# Altium PCB BOOSTXL-K350QVG-S1.PcbDoc (part 3 of 4)
Units mm, origin at the board's own origin, x right, y up, seen from the top; angles counter-clockwise.
Board outline 152.4 x 101.6 mm, 2 copper layers (Top Layer, Bottom Layer); 36 components, 58 nets, 6671 pads, 44 vias.
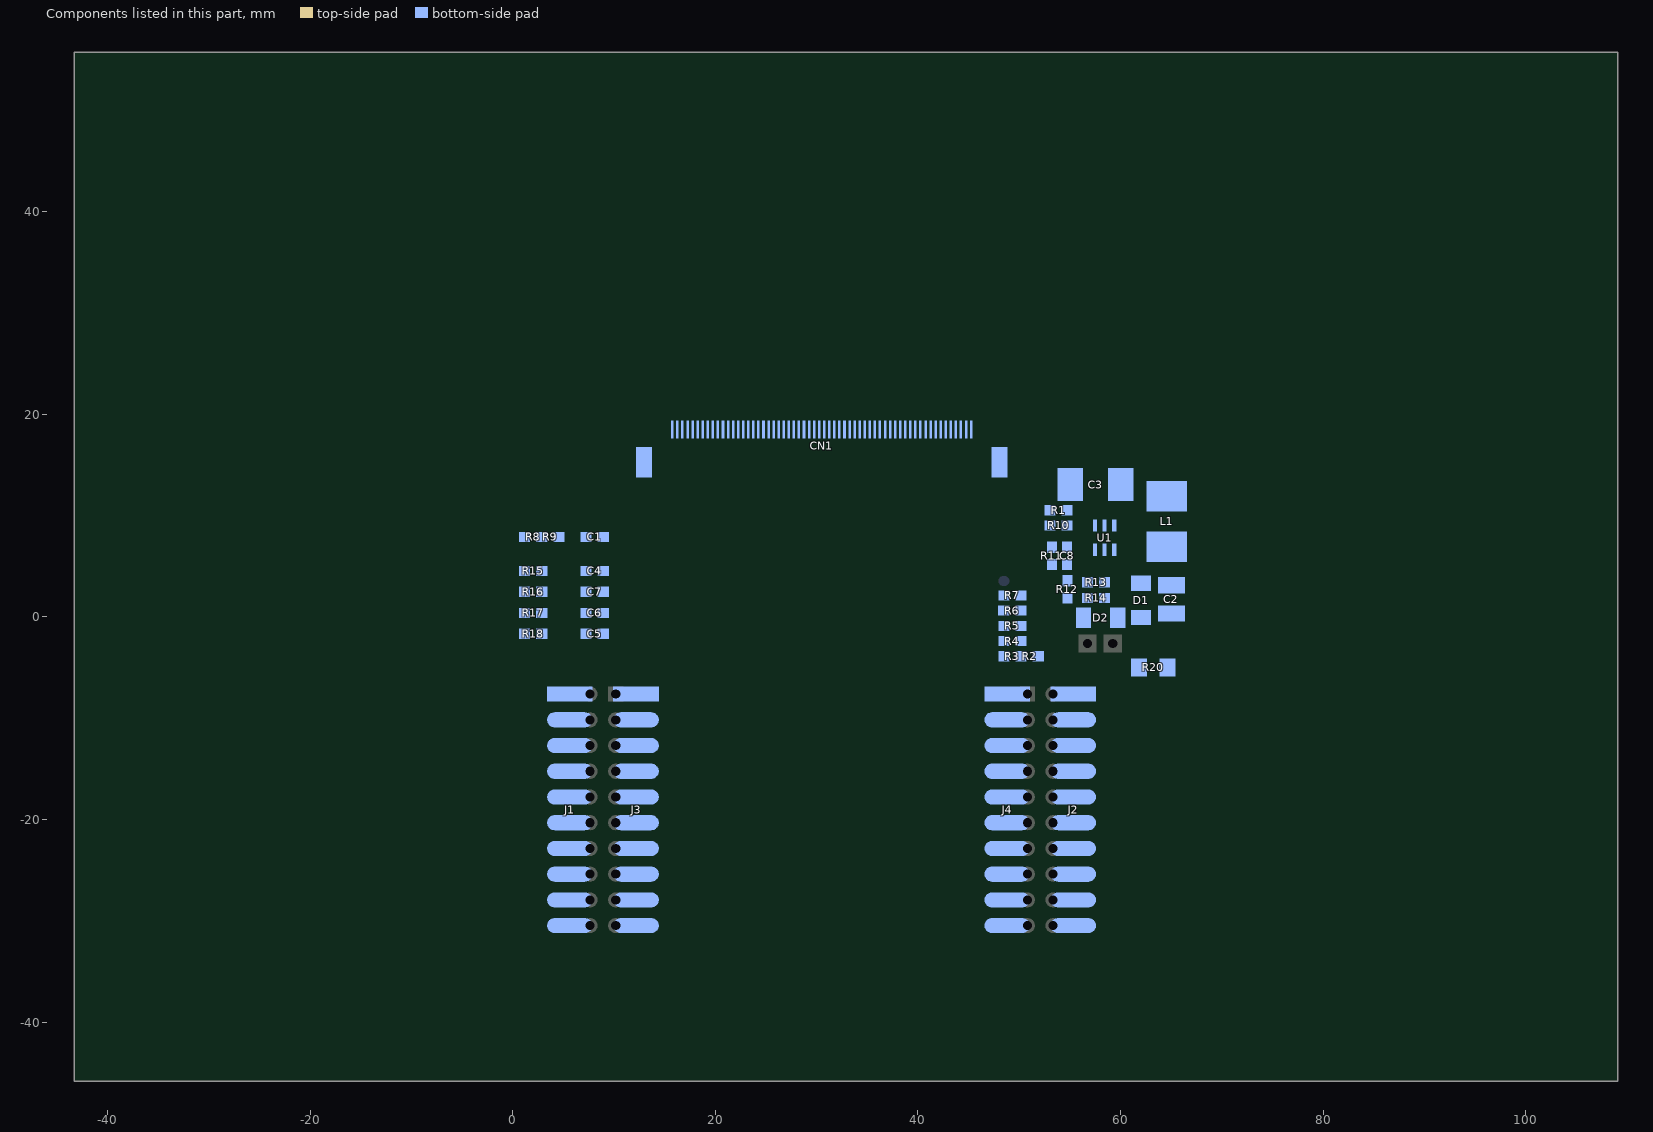
[diagram p3: the components of this part, seen from the top]

## Free pads (board coordinates) (continued)
  round 0.018 on Bottom Overlay: 1(57.879,18.56) 1(57.879,18.578) 1(57.879,18.596) 1(57.879,18.613) 1(57.879,18.631) 1(57.879,18.649) 1(57.879,18.667) 1(57.879,18.685) 1(57.879,18.987) 1(57.879,19.005) 1(57.879,19.022) 1(57.879,19.04) 1(57.879,19.058) 1(57.879,19.076) 1(57.879,19.094) 1(57.897,18.702) 1(57.897,18.72) 1(57.897,18.933) 1(57.897,18.951) 1(57.897,18.969) 1(57.914,18.738) 1(57.914,19.52) 1(57.932,18.916) 1(57.986,18.756) 1(58.032,15.298) 1(58.032,15.315) 1(58.032,15.333) 1(58.032,15.351) 1(58.032,15.369) 1(58.032,15.386) 1(58.032,16.933) 1(58.032,16.951) 1(58.032,16.969) 1(58.032,16.987) 1(58.032,17.004) 1(58.032,17.022) 1(58.157,15.404) 1(58.157,16.915) 1(58.21,15.422) 1(58.21,16.898) 1(58.228,15.44) 1(58.228,15.458) 1(58.228,15.475) 1(58.228,15.493) 1(58.228,16.827) 1(58.228,16.844) 1(58.228,16.862) 1(58.228,16.88) 1(58.246,15.511) 1(58.246,15.529) 1(58.246,15.546) 1(58.246,15.564) 1(58.246,15.582) 1(58.246,15.6) 1(58.246,15.618) 1(58.246,15.635) 1(58.246,15.653) 1(58.246,15.671) 1(58.246,15.689) 1(58.246,15.706) 1(58.246,15.724) 1(58.246,15.742) 1(58.246,15.76) 1(58.246,15.778) 1(58.246,15.795) 1(58.246,15.813) 1(58.246,15.831) 1(58.246,15.849) 1(58.246,15.866) 1(58.246,15.884) 1(58.246,15.902) 1(58.246,15.92) 1(58.246,15.938) 1(58.246,15.955) 1(58.246,15.973) 1(58.246,15.991) 1(58.246,16.009) 1(58.246,16.026) 1(58.246,16.044) 1(58.246,16.062) 1(58.246,16.08) 1(58.246,16.098) 1(58.246,16.115) 1(58.246,16.133) 1(58.246,16.151) 1(58.246,16.169) 1(58.246,16.187) 1(58.246,16.204) 1(58.246,16.222) 1(58.246,16.24) 1(58.246,16.258) 1(58.246,16.275) 1(58.246,16.293) 1(58.246,16.311) 1(58.246,16.329) 1(58.246,16.347) 1(58.246,16.364) 1(58.246,16.382) 1(58.246,16.4) 1(58.246,16.418) 1(58.246,16.435) 1(58.246,16.453) 1(58.246,16.471) 1(58.246,16.489) 1(58.246,16.507) 1(58.246,16.524) 1(58.246,16.542) 1(58.246,16.56) 1(58.246,16.578) 1(58.246,16.595) 1(58.246,16.613) 1(58.246,16.631) 1(58.246,16.649) 1(58.246,16.667) 1(58.246,16.684) 1(58.246,16.702) 1(58.246,16.72) 1(58.246,16.738) 1(58.246,16.755) 1(58.246,16.773) 1(58.246,16.791) 1(58.246,16.809) 1(58.323,19.485) 1(58.323,19.502) 1(58.323,19.52) 1(58.341,18.062) 1(58.341,18.08) 1(58.341,18.098) 1(58.341,18.116) 1(58.341,18.133) 1(58.341,18.151) 1(58.341,18.169) 1(58.341,18.187) 1(58.341,18.205) 1(58.341,18.222) 1(58.341,18.24) 1(58.341,18.258) 1(58.341,18.276) 1(58.341,18.293) 1(58.341,18.311) 1(58.341,18.329) 1(58.341,18.347) 1(58.341,18.365) 1(58.341,18.382) 1(58.341,18.4) 1(58.341,18.418) 1(58.341,18.436) 1(58.341,18.453) 1(58.341,18.471) 1(58.341,18.489) 1(58.341,18.507) 1(58.341,18.525) 1(58.341,18.542) 1(58.341,18.56) 1(58.341,18.578) 1(58.341,18.596) 1(58.341,18.613) 1(58.341,18.631) 1(58.341,18.649) 1(58.341,18.667) 1(58.341,18.685) 1(58.341,18.702) 1(58.341,18.72) 1(58.341,18.738) 1(58.341,18.756) 1(58.341,18.916) 1(58.341,18.933) 1(58.341,18.951) 1(58.341,18.969) 1(58.341,18.987) 1(58.341,19.005) 1(58.341,19.022) 1(58.341,19.04) 1(58.341,19.058) 1(58.341,19.076) 1(58.341,19.094) 1(58.341,19.111) 1(58.341,19.129) 1(58.341,19.147) 1(58.341,19.165) 1(58.341,19.182) 1(58.341,19.2) 1(58.341,19.218) 1(58.341,19.236) 1(58.341,19.254) 1(58.341,19.271) 1(58.341,19.289) 1(58.341,19.307) 1(58.341,19.325) 1(58.341,19.342) 1(58.341,19.36) 1(58.341,19.378) 1(58.341,19.396) 1(58.341,19.414) 1(58.341,19.431) 1(58.341,19.449) 1(58.341,19.467) 1(58.601,15.511) 1(58.601,15.529) 1(58.601,15.546) 1(58.601,15.564) 1(58.601,15.582) 1(58.601,15.6) 1(58.601,15.618) 1(58.601,15.635) 1(58.601,15.653) 1(58.601,15.671) 1(58.601,15.689) 1(58.601,15.706) 1(58.601,15.724) 1(58.601,15.742) 1(58.601,15.76) 1(58.601,15.778) 1(58.601,15.795) 1(58.601,15.813) 1(58.601,15.831) 1(58.601,15.849) 1(58.601,15.866) 1(58.601,15.884) 1(58.601,15.902) 1(58.601,15.92) 1(58.601,15.938) 1(58.601,15.955) 1(58.601,15.973) 1(58.601,15.991) 1(58.601,16.009) 1(58.601,16.026) 1(58.601,16.044) 1(58.601,16.062) 1(58.601,16.08) 1(58.601,16.098) 1(58.601,16.115) 1(58.601,16.133) 1(58.601,16.151) 1(58.601,16.169) 1(58.601,16.187) 1(58.601,16.204) 1(58.601,16.222) 1(58.601,16.24) 1(58.601,16.258) 1(58.601,16.275) 1(58.601,16.293) 1(58.601,16.311) 1(58.601,16.329) 1(58.601,16.347) 1(58.601,16.364) 1(58.601,16.382) 1(58.601,16.4) 1(58.601,16.418) 1(58.601,16.435) 1(58.601,16.453) 1(58.601,16.471) 1(58.601,16.489) 1(58.601,16.507) 1(58.601,16.524) 1(58.601,16.542) 1(58.601,16.56) 1(58.601,16.578) 1(58.601,16.595) 1(58.601,16.613) 1(58.601,16.631) 1(58.601,16.649) 1(58.601,16.667) 1(58.601,16.684) 1(58.601,16.702) 1(58.601,16.72) 1(58.601,16.738) 1(58.601,16.755) 1(58.601,16.773) 1(58.601,16.791) 1(58.601,16.809) 1(58.619,15.44) 1(58.619,15.458) 1(58.619,15.475) 1(58.619,15.493) 1(58.619,16.827) 1(58.619,16.844) 1(58.619,16.862) 1(58.619,16.88) 1(58.637,15.422) 1(58.637,16.898) 1(58.69,15.404) 1(58.69,16.915) 1(58.697,18.098) 1(58.697,18.116) 1(58.697,18.133) 1(58.697,18.151) 1(58.697,18.169) 1(58.697,18.187) 1(58.697,18.205) 1(58.697,18.222) 1(58.697,18.24) 1(58.697,18.258) 1(58.697,18.276) 1(58.697,18.293) 1(58.697,18.311) 1(58.697,18.329) 1(58.697,18.347) 1(58.697,18.365) 1(58.697,18.382) 1(58.697,18.4) 1(58.697,18.418) 1(58.697,18.436) 1(58.697,18.453) 1(58.697,18.471) 1(58.697,18.489) 1(58.697,18.507) 1(58.697,18.525) 1(58.697,18.542) 1(58.697,18.56) 1(58.697,18.578) 1(58.697,18.596) 1(58.697,18.613) 1(58.697,18.631) 1(58.697,18.649) 1(58.697,18.667) 1(58.697,18.685) 1(58.697,18.702) 1(58.697,18.72) 1(58.697,18.738) 1(58.697,18.756) 1(58.697,18.773) 1(58.697,18.791) 1(58.697,18.809) 1(58.697,18.827) 1(58.697,18.845) 1(58.697,18.862) 1(58.697,18.88) 1(58.697,18.898) 1(58.697,18.916) 1(58.697,18.933) 1(58.697,18.951) 1(58.697,18.969) 1(58.697,18.987) 1(58.697,19.005) 1(58.697,19.022) 1(58.697,19.04) 1(58.697,19.058) 1(58.697,19.076) 1(58.697,19.094) 1(58.697,19.111) 1(58.697,19.129) 1(58.697,19.147) 1(58.697,19.165) 1(58.697,19.182) 1(58.697,19.2) 1(58.697,19.218) 1(58.697,19.236) 1(58.697,19.254) 1(58.697,19.271) 1(58.697,19.289) 1(58.697,19.307) 1(58.697,19.325) 1(58.697,19.342) 1(58.697,19.36) 1(58.697,19.378) 1(58.697,19.396) 1(58.697,19.414) 1(58.697,19.431) 1(58.715,18.027) 1(58.715,18.044) 1(58.715,18.062) 1(58.715,18.08) 1(58.715,19.449) 1(58.715,19.467) 1(58.715,19.485) 1(58.715,19.502) 1(58.715,19.52) 1(58.732,19.538) 1(58.75,18.009) 1(58.768,17.991) 1(58.786,19.556) 1(58.803,17.973) 1(58.815,15.298) 1(58.815,15.315) 1(58.815,15.333) 1(58.815,15.351) 1(58.815,15.369) 1(58.815,15.386) 1(58.815,16.933) 1(58.815,16.951) 1(58.815,16.969) 1(58.815,16.987) 1(58.815,17.004) 1(58.815,17.022) 1(58.821,17.92) 1(58.821,17.938) 1(58.821,17.956) 1(58.91,19.574) 1(58.91,19.591) 1(58.91,19.609) 1(58.91,19.627) 1(58.91,19.645) 1(58.91,19.662) 1(59.035,17.92) 1(59.035,17.938) 1(59.035,17.956) 1(59.035,17.973) 1(59.035,17.991) 1(59.035,18.009) 1(59.046,16.115) 1(59.046,16.133) 1(59.046,16.151) 1(59.046,16.169) 1(59.046,16.187) 1(59.046,16.204) 1(59.046,16.222) 1(59.046,16.24) 1(59.046,16.258) 1(59.046,16.275) 1(59.046,16.293) 1(59.046,16.311) 1(59.046,16.329) 1(59.046,16.347) 1(59.046,16.364) 1(59.046,16.382) 1(59.046,16.4) 1(59.064,16.026) 1(59.064,16.044) 1(59.064,16.062) 1(59.064,16.08) 1(59.064,16.098) 1(59.064,16.418) 1(59.064,16.435) 1(59.064,16.453) 1(59.064,16.471) 1(59.064,16.489) 1(59.081,15.955) 1(59.081,15.973) 1(59.081,15.991) 1(59.081,16.009) 1(59.081,16.507) 1(59.081,16.524) 1(59.081,16.542) 1(59.081,16.56) 1(59.099,15.902) 1(59.099,15.92) 1(59.099,15.938) 1(59.099,16.578) 1(59.099,16.595) 1(59.099,16.613) 1(59.106,19.591) 1(59.106,19.609) 1(59.106,19.627) 1(59.106,19.645) 1(59.106,19.662) 1(59.117,15.849) 1(59.117,15.866) 1(59.117,15.884) 1(59.117,16.631) 1(59.117,16.649) 1(59.124,18.027) 1(59.124,19.574) 1(59.135,15.813) 1(59.135,15.831) 1(59.135,16.667) 1(59.135,16.684) 1(59.152,15.778) 1(59.152,15.795) 1(59.152,16.702) 1(59.159,18.044) 1(59.17,15.76) 1(59.17,16.72) 1(59.17,16.738) 1(59.177,18.062) 1(59.188,15.724) 1(59.188,15.742) 1(59.188,16.755) 1(59.195,18.08) 1(59.206,15.706) 1(59.206,16.773) 1(59.212,18.098) 1(59.224,15.671) 1(59.224,15.689) 1(59.224,16.791) 1(59.224,16.809) 1(59.23,18.116) 1(59.241,15.653) 1(59.241,16.827) 1(59.248,18.133) 1(59.259,15.635) 1(59.266,18.151) 1(59.266,19.556) 1(59.277,15.618) 1(59.277,16.844) 1(59.284,18.169) 1(59.295,15.582) 1(59.295,15.6) 1(59.295,16.862) 1(59.301,18.187) 1(59.312,15.564) 1(59.312,16.88) 1(59.319,18.205) 1(59.319,19.538) 1(59.33,15.546) 1(59.33,16.898) 1(59.337,18.222) 1(59.337,19.52) 1(59.348,15.529) 1(59.355,18.24) 1(59.366,16.915) 1(59.372,18.258) 1(59.372,19.502) 1(59.384,15.511) 1(59.39,18.276) 1(59.39,19.485) 1(59.401,15.493) 1(59.401,16.933) 1(59.408,18.293) 1(59.408,18.311) 1(59.408,19.467) 1(59.419,15.475) 1(59.426,18.329) 1(59.426,19.449) 1(59.437,16.062) 1(59.437,16.08) 1(59.437,16.098) 1(59.437,16.115) 1(59.437,16.133) 1(59.437,16.151) 1(59.437,16.169) 1(59.437,16.187) 1(59.437,16.204) 1(59.437,16.222) 1(59.437,16.24) 1(59.437,16.258) 1(59.437,16.275) 1(59.437,16.293) 1(59.437,16.311) 1(59.437,16.329) 1(59.437,16.347) 1(59.437,16.951) 1(59.444,18.347) 1(59.444,19.431) 1(59.455,15.458) 1(59.455,15.955) 1(59.455,15.973) 1(59.455,15.991) 1(59.455,16.009) 1(59.455,16.026) 1(59.455,16.044) 1(59.455,16.364) 1(59.455,16.382) 1(59.455,16.4) 1(59.455,16.418) 1(59.455,16.435) 1(59.461,18.365) 1(59.472,15.44) 1(59.472,15.884) 1(59.472,15.902) 1(59.472,15.92) 1(59.472,15.938) 1(59.472,16.453) 1(59.472,16.471) 1(59.472,16.489) 1(59.472,16.507) 1(59.472,16.969) 1(59.479,18.382) 1(59.479,19.414) 1(59.49,15.831) 1(59.49,15.849) 1(59.49,15.866) 1(59.49,16.524) 1(59.49,16.542) 1(59.497,18.4) 1(59.497,19.396) 1(59.508,15.422) 1(59.508,15.795) 1(59.508,15.813) 1(59.508,16.56) 1(59.508,16.578) 1(59.508,16.595) 1(59.515,18.418) 1(59.515,19.378) 1(59.526,15.76) 1(59.526,15.778) 1(59.526,16.613) 1(59.526,16.987) 1(59.532,18.436) 1(59.532,18.453) 1(59.532,19.36) 1(59.544,15.404) 1(59.544,15.724) 1(59.544,15.742) 1(59.544,16.631) 1(59.544,16.649) 1(59.55,17.92) 1(59.55,18.471) 1(59.55,19.342) 1(59.561,15.689) 1(59.561,15.706) 1(59.561,16.667) 1(59.568,17.938) 1(59.568,18.489) 1(59.568,19.325) 1(59.568,19.574) 1(59.568,19.591) 1(59.568,19.609) 1(59.568,19.627) 1(59.568,19.645) 1(59.568,19.662) 1(59.579,15.386) 1(59.579,15.671) 1(59.579,16.684) 1(59.579,16.702) 1(59.586,17.956) 1(59.586,17.973) 1(59.586,18.507) 1(59.586,19.307) 1(59.586,19.556) 1(59.597,15.653) 1(59.597,16.72) 1(59.604,17.991) 1(59.604,18.525) 1(59.604,19.289) 1(59.604,19.538) 1(59.615,15.369) 1(59.615,15.618) 1(59.615,15.635) 1(59.615,16.738) 1(59.615,17.004) 1(59.621,18.009) 1(59.621,18.542) 1(59.621,19.271) 1(59.621,19.52) 1(59.632,15.6) 1(59.632,16.755) 1(59.639,18.027) 1(59.639,18.56) 1(59.639,18.578) 1(59.639,19.254) 1(59.639,19.502) 1(59.65,15.351) 1(59.65,15.582) 1(59.65,16.773) 1(59.657,18.044) 1(59.657,18.062) 1(59.657,18.596) 1(59.657,19.236) 1(59.657,19.485) 1(59.668,15.564) 1(59.675,18.08) 1(59.675,18.613) 1(59.675,19.218) 1(59.675,19.467) 1(59.686,16.791) 1(59.692,18.098) 1(59.692,18.631) 1(59.692,19.2) 1(59.692,19.431) 1(59.692,19.449) 1(59.704,15.333) 1(59.704,15.546) 1(59.704,16.809) 1(59.71,18.116) 1(59.71,18.649) 1(59.71,19.182) 1(59.71,19.414) 1(59.721,15.529) 1(59.728,18.133) 1(59.728,18.667) 1(59.728,19.165) 1(59.728,19.396) 1(59.739,16.827) 1(59.739,17.022) 1(59.746,18.151) 1(59.746,18.685) 1(59.746,19.147) 1(59.746,19.378) 1(59.757,15.511) 1(59.764,18.169) 1(59.764,18.702) 1(59.764,18.72) 1(59.764,19.129) 1(59.764,19.36) 1(59.775,15.315) 1(59.781,18.187) 1(59.781,18.738) 1(59.781,19.111) 1(59.781,19.342) 1(59.793,15.493) 1(59.793,16.844) 1(59.799,18.205) 1(59.799,18.222) 1(59.799,18.756) 1(59.799,19.094) 1(59.799,19.325) 1(59.817,18.24) 1(59.817,18.773) 1(59.817,19.076) 1(59.817,19.307) 1(59.828,15.475) 1(59.835,18.258) 1(59.835,18.791) 1(59.835,19.058) 1(59.835,19.289) 1(59.846,16.862) 1(59.853,18.276) 1(59.853,18.809) 1(59.853,18.827) 1(59.853,19.04) 1(59.853,19.271) 1(59.864,15.298) 1(59.87,18.293) 1(59.87,18.845) 1(59.87,19.022) 1(59.87,19.254) 1(59.881,15.458) 1(59.888,18.311) 1(59.888,18.862) 1(59.888,19.005) 1(59.888,19.236) 1(59.906,18.329) 1(59.906,18.88) 1(59.906,18.987) 1(59.906,19.218) 1(59.924,18.347) 1(59.924,18.365) 1(59.924,18.898) 1(59.924,18.969) 1(59.924,19.2) 1(59.941,18.382) 1(59.941,18.916) 1(59.941,18.933) 1(59.941,18.951) 1(59.941,19.182) 1(59.953,16.88) 1(59.959,18.4) 1(59.959,19.165) 1(59.977,18.418) 1(59.977,19.147) 1(59.988,15.44) 1(59.995,18.436) 1(59.995,19.129) 1(60.013,18.453) 1(60.013,19.111) 1(60.03,18.471) 1(60.03,19.094) 1(60.048,18.489) 1(60.048,18.507) 1(60.048,19.076) 1(60.066,18.525) 1(60.066,19.058) 1(60.084,18.542) 1(60.084,19.04) 1(60.101,17.92) 1(60.101,17.938) 1(60.101,17.956) 1(60.101,17.973) 1(60.101,17.991) 1(60.101,18.009) 1(60.101,18.56) 1(60.101,19.022) 1(60.101,19.574) 1(60.101,19.591) 1(60.101,19.609) 1(60.101,19.627) 1(60.101,19.645) 1(60.101,19.662) 1(60.119,18.578) 1(60.119,19.005) 1(60.137,18.596) 1(60.137,18.987) 1(60.155,18.613) 1(60.155,18.969) 1(60.173,18.631) 1(60.173,18.951) 1(60.19,18.649) 1(60.19,18.933) 1(60.208,18.667) 1(60.208,18.916) 1(60.226,18.027) 1(60.226,18.685) 1(60.226,18.898) 1(60.226,19.556) 1(60.244,18.702) 1(60.244,18.88) 1(60.261,18.72) 1(60.261,18.862) 1(60.279,18.044) 1(60.279,18.845) 1(60.279,19.538) 1(60.297,18.062) 1(60.297,18.08) 1(60.297,18.098) 1(60.297,18.116) 1(60.297,18.133) 1(60.297,18.738) 1(60.297,18.827) 1(60.297,19.449) 1(60.297,19.467) 1(60.297,19.485) 1(60.297,19.502) 1(60.297,19.52) 1(60.308,15.44) 1(60.308,16.88) 1(60.315,18.151) 1(60.315,18.169) 1(60.315,18.187) 1(60.315,18.205) 1(60.315,18.222) 1(60.315,18.24) 1(60.315,18.258) 1(60.315,18.276) 1(60.315,18.293) 1(60.315,18.311) 1(60.315,18.329) 1(60.315,18.347) 1(60.315,18.365) 1(60.315,18.382) 1(60.315,18.4) 1(60.315,18.418) 1(60.315,18.436) 1(60.315,18.453) 1(60.315,18.471) 1(60.315,18.489) 1(60.315,18.507) 1(60.315,18.525) 1(60.315,18.542) 1(60.315,18.56) 1(60.315,18.578) 1(60.315,18.596) 1(60.315,18.613) 1(60.315,18.631) 1(60.315,18.649) 1(60.315,18.667) 1(60.315,18.685) 1(60.315,18.702) 1(60.315,18.72) 1(60.315,18.738) 1(60.315,18.827) 1(60.315,18.845) 1(60.315,18.862) 1(60.315,18.88) 1(60.315,18.898) 1(60.315,18.916) 1(60.315,18.933) 1(60.315,18.951) 1(60.315,18.969) 1(60.315,18.987) 1(60.315,19.005) 1(60.315,19.022) 1(60.315,19.04) 1(60.315,19.058) 1(60.315,19.076) 1(60.315,19.094) 1(60.315,19.111) 1(60.315,19.129) 1(60.315,19.147) 1(60.315,19.165) 1(60.315,19.182) 1(60.315,19.2) 1(60.315,19.218) 1(60.315,19.236) 1(60.315,19.254) 1(60.315,19.271) 1(60.315,19.289) 1(60.315,19.307) 1(60.315,19.325) 1(60.315,19.342) 1(60.315,19.36) 1(60.315,19.378) 1(60.315,19.396) 1(60.315,19.414) 1(60.315,19.431) 1(60.361,15.458) 1(60.361,15.475) 1(60.361,16.827) 1(60.361,16.844) 1(60.361,16.862) 1(60.379,15.493) 1(60.379,15.511) 1(60.379,15.529) 1(60.379,15.546) 1(60.379,15.564) 1(60.379,15.582) 1(60.379,15.6) 1(60.379,15.618) 1(60.379,15.635) 1(60.379,15.653) 1(60.379,15.671) 1(60.379,15.689) 1(60.379,15.706) 1(60.379,15.724) 1(60.379,15.742) 1(60.379,15.76) 1(60.379,15.778) 1(60.379,15.795) 1(60.379,15.813) 1(60.379,15.831) 1(60.379,15.849) 1(60.379,15.866) 1(60.379,15.884) 1(60.379,15.902) 1(60.379,15.92) 1(60.379,15.938) 1(60.379,15.955) 1(60.379,15.973) 1(60.379,15.991) 1(60.379,16.009) 1(60.379,16.026) 1(60.379,16.044) 1(60.379,16.062) 1(60.379,16.08) 1(60.379,16.098) 1(60.379,16.115) 1(60.379,16.133) 1(60.379,16.151) 1(60.379,16.169) 1(60.379,16.187) 1(60.379,16.204) 1(60.379,16.222) 1(60.379,16.24) 1(60.379,16.258) 1(60.379,16.275) 1(60.379,16.293) 1(60.379,16.311) 1(60.379,16.329) 1(60.379,16.347) 1(60.379,16.364) 1(60.379,16.382) 1(60.379,16.4) 1(60.379,16.418) 1(60.379,16.435) 1(60.379,16.453) 1(60.379,16.471) 1(60.379,16.489) 1(60.379,16.507) 1(60.379,16.524) 1(60.379,16.542) 1(60.379,16.56) 1(60.379,16.578) 1(60.379,16.595) 1(60.379,16.613) 1(60.379,16.631) 1(60.379,16.649) 1(60.379,16.667) 1(60.379,16.684) 1(60.379,16.702) 1(60.379,16.72) 1(60.379,16.738) 1(60.379,16.755) 1(60.379,16.773) 1(60.379,16.791) 1(60.379,16.809) 1(60.67,18.151) 1(60.67,18.169) 1(60.67,18.187) 1(60.67,18.205) 1(60.67,18.222) 1(60.67,18.24) 1(60.67,18.258) 1(60.67,18.276) 1(60.67,18.293) 1(60.67,18.311) 1(60.67,18.329) 1(60.67,18.347) 1(60.67,18.365) 1(60.67,18.382) 1(60.67,18.4) 1(60.67,18.418) 1(60.67,18.436) 1(60.67,18.453) 1(60.67,18.471) 1(60.67,18.489) 1(60.67,18.507) 1(60.67,18.525) 1(60.67,18.542) 1(60.67,18.56) 1(60.67,18.578) 1(60.67,18.596) 1(60.67,18.613) 1(60.67,18.631) 1(60.67,18.649) 1(60.67,18.667) 1(60.67,18.685) 1(60.67,18.702) 1(60.67,18.72) 1(60.67,18.738) 1(60.67,18.756) 1(60.67,18.773) 1(60.67,18.791) 1(60.67,18.809) 1(60.67,18.827) 1(60.67,18.845) 1(60.67,18.862) 1(60.67,18.88) 1(60.67,18.898) 1(60.67,18.916) 1(60.67,18.933) 1(60.67,18.951) 1(60.67,18.969) 1(60.67,18.987) 1(60.67,19.005) 1(60.67,19.022) 1(60.67,19.04) 1(60.67,19.058) 1(60.67,19.076) 1(60.67,19.094) 1(60.67,19.111) 1(60.67,19.129) 1(60.67,19.147) 1(60.67,19.165) 1(60.67,19.182) 1(60.67,19.2) 1(60.67,19.218) 1(60.67,19.236) 1(60.67,19.254) 1(60.67,19.271) 1(60.67,19.289) 1(60.67,19.307) 1(60.67,19.325) 1(60.67,19.342) 1(60.67,19.36) 1(60.67,19.378) 1(60.67,19.396) 1(60.67,19.414) 1(60.67,19.431) 1(60.688,18.062) 1(60.688,18.08) 1(60.688,18.098) 1(60.688,18.116) 1(60.688,18.133) 1(60.688,19.449) 1(60.688,19.467) 1(60.688,19.485) 1(60.688,19.502) 1(60.688,19.52) 1(60.706,18.044) 1(60.706,19.538) 1(60.735,15.475) 1(60.735,15.493) 1(60.735,15.511) 1(60.735,15.529) 1(60.735,15.546) 1(60.735,15.564) 1(60.735,15.582) 1(60.735,15.6) 1(60.735,15.618) 1(60.735,15.635) 1(60.735,15.653) 1(60.735,15.671) 1(60.735,15.689) 1(60.735,15.706) 1(60.735,15.724) 1(60.735,15.742) 1(60.735,15.76) 1(60.735,15.778) 1(60.735,15.795) 1(60.735,15.813) 1(60.735,15.831) 1(60.735,15.849) 1(60.735,15.866) 1(60.735,15.884) 1(60.735,15.902) 1(60.735,15.92) 1(60.735,15.938) 1(60.735,15.955) 1(60.735,15.973) 1(60.735,15.991) 1(60.735,16.009) 1(60.735,16.026) 1(60.735,16.044) 1(60.735,16.062) 1(60.735,16.08) 1(60.735,16.098) 1(60.735,16.115) 1(60.735,16.133) 1(60.735,16.151) 1(60.735,16.169) 1(60.735,16.187) 1(60.735,16.204) 1(60.735,16.222) 1(60.735,16.24) 1(60.735,16.258) 1(60.735,16.275) 1(60.735,16.293) 1(60.735,16.311) 1(60.735,16.329) 1(60.735,16.347) 1(60.735,16.364) 1(60.735,16.382) 1(60.735,16.4) 1(60.735,16.418) 1(60.735,16.435) 1(60.735,16.453) 1(60.735,16.471) 1(60.735,16.489) 1(60.735,16.507) 1(60.735,16.524) 1(60.735,16.542) 1(60.735,16.56) 1(60.735,16.578) 1(60.735,16.595) 1(60.735,16.613) 1(60.735,16.631) 1(60.735,16.649) 1(60.735,16.667) 1(60.735,16.684) 1(60.735,16.702) 1(60.735,16.72) 1(60.735,16.738) 1(60.735,16.755) 1(60.735,16.773) 1(60.735,16.791) 1(60.753,15.404) 1(60.753,15.422) 1(60.753,15.44) 1(60.753,15.458) 1(60.753,16.809) 1(60.753,16.827) 1(60.753,16.844) 1(60.753,16.862) 1(60.753,16.88) 1(60.759,18.027) 1(60.759,19.556) 1(60.77,16.898) 1(60.788,15.386) 1(60.806,15.369) 1(60.824,16.915) 1(60.842,15.351) 1(60.859,15.298) 1(60.859,15.315) 1(60.859,15.333) 1(60.884,17.92) 1(60.884,17.938) 1(60.884,17.956) 1(60.884,17.973) 1(60.884,17.991) 1(60.884,18.009) 1(60.884,19.574) 1(60.884,19.591) 1(60.884,19.609) 1(60.884,19.627) 1(60.884,19.645) 1(60.884,19.662) 1(60.948,16.933) 1(60.948,16.951) 1(60.948,16.969) 1(60.948,16.987) 1(60.948,17.004) 1(60.948,17.022) 1(61.474,17.716) 1(61.474,17.733) 1(61.474,17.751) 1(61.474,17.769) 1(61.474,17.787) 1(61.474,17.804) 1(61.474,17.822) 1(61.474,17.84) 1(61.474,17.858) 1(61.492,17.538) 1(61.492,17.556) 1(61.492,17.573) 1(61.492,17.591) 1(61.492,17.609) 1(61.492,17.627) 1(61.492,17.644) 1(61.492,17.662) 1(61.492,17.68) 1(61.492,17.698) 1(61.492,17.876) 1(61.492,17.893) 1(61.492,17.911) 1(61.492,17.929) 1(61.492,17.947) 1(61.492,17.965) 1(61.492,17.982) 1(61.492,18) 1(61.51,17.396) 1(61.51,17.413) 1(61.51,17.431) 1(61.51,17.449) 1(61.51,17.467) 1(61.51,17.484) 1(61.51,17.502) 1(61.51,17.52) 1(61.51,18.018) 1(61.51,18.036) 1(61.51,18.053) 1(61.51,18.071) 1(61.51,18.089) 1(61.51,18.107) 1(61.51,18.125) 1(61.51,18.142) 1(61.51,18.16) 1(61.527,17.289) 1(61.527,17.307) 1(61.527,17.324) 1(61.527,17.342) 1(61.527,17.36) 1(61.527,17.378) 1(61.527,18.178) 1(61.527,18.196) 1(61.527,18.213) 1(61.527,18.231) 1(61.527,18.249) 1(61.527,18.267) 1(61.545,17.147) 1(61.545,17.164) 1(61.545,17.182) 1(61.545,17.2) 1(61.545,17.218) 1(61.545,17.236) 1(61.545,17.253) 1(61.545,17.271) 1(61.545,18.285) 1(61.545,18.302) 1(61.545,18.32) 1(61.545,18.338) 1(61.545,18.356) 1(61.545,18.373) 1(61.545,18.391) 1(61.563,17.004) 1(61.563,17.022) 1(61.563,17.04) 1(61.563,17.058) 1(61.563,17.076) 1(61.563,17.093) 1(61.563,17.111) 1(61.563,17.129) 1(61.563,18.409) 1(61.563,18.427) 1(61.563,18.445) 1(61.563,18.462) 1(61.563,18.48) 1(61.563,18.498) 1(61.563,18.516) 1(61.563,18.533) 1(61.581,16.915) 1(61.581,16.933) 1(61.581,16.951) 1(61.581,16.969) 1(61.581,16.987) 1(61.581,18.551) 1(61.581,18.569) 1(61.581,18.587) 1(61.581,18.605) 1(61.581,18.622) 1(61.581,18.64) 1(61.598,16.88) 1(61.598,16.898) 1(61.598,17.431) 1(61.598,17.449) 1(61.598,17.467) 1(61.598,18.658) 1(61.598,18.676) 1(61.616,16.827) 1(61.616,16.844) 1(61.616,16.862) 1(61.616,17.342) 1(61.616,17.36) 1(61.616,17.431) 1(61.616,17.449) 1(61.616,17.467) 1(61.616,17.929) 1(61.616,17.947) 1(61.616,17.965) 1(61.616,17.982) 1(61.616,18) 1(61.616,18.693) 1(61.616,18.711) 1(61.616,18.729) 1(61.634,16.791) 1(61.634,16.809) 1(61.634,17.342) 1(61.634,17.36) 1(61.634,18.018) 1(61.634,18.036) 1(61.634,18.053) 1(61.634,18.071) 1(61.634,18.089) 1(61.634,18.107) 1(61.634,18.125) 1(61.634,18.142) 1(61.634,18.16) 1(61.634,18.747) 1(61.634,18.765) 1(61.652,16.738) 1(61.652,16.755) 1(61.652,16.773) 1(61.652,18.178) 1(61.652,18.196) 1(61.652,18.213) 1(61.652,18.231) 1(61.652,18.249) 1(61.652,18.267) 1(61.652,18.285) 1(61.652,18.782) 1(61.652,18.8) 1(61.67,16.684) 1(61.67,16.702) 1(61.67,16.72) 1(61.67,17.129) 1(61.67,17.147) 1(61.67,18.302) 1(61.67,18.32) 1(61.67,18.338) 1(61.67,18.356) 1(61.67,18.373) 1(61.67,18.391) 1(61.67,18.409) 1(61.67,18.818) 1(61.67,18.836) 1(61.67,18.854) 1(61.687,16.649) 1(61.687,16.667) 1(61.687,17.022) 1(61.687,17.04) 1(61.687,17.058) 1(61.687,17.076) 1(61.687,17.093) 1(61.687,17.111) 1(61.687,17.911) 1(61.687,18.427) 1(61.687,18.445) 1(61.687,18.462) 1(61.687,18.48) 1(61.687,18.498) 1(61.687,18.516) 1(61.687,18.871) 1(61.687,18.889) 1(61.705,16.595) 1(61.705,16.613) 1(61.705,16.631) 1(61.705,16.933) 1(61.705,16.951) 1(61.705,16.969) 1(61.705,16.987) 1(61.705,17.004) 1(61.705,18.533) 1(61.705,18.551) 1(61.705,18.569) 1(61.705,18.587) 1(61.705,18.605) 1(61.705,18.907) 1(61.705,18.925) 1(61.705,18.942) 1(61.723,16.56) 1(61.723,16.578) 1(61.723,16.898) 1(61.723,16.915) 1(61.723,18.622) 1(61.723,18.64) 1(61.723,18.96) 1(61.723,18.978) 1(61.741,16.507) 1(61.741,16.524) 1(61.741,16.542) 1(61.741,16.844) 1(61.741,16.862) 1(61.741,16.88) 1(61.741,18.658) 1(61.741,18.676) 1(61.741,18.693) 1(61.741,18.996) 1(61.741,19.014) 1(61.741,19.031) 1(61.758,16.471) 1(61.758,16.489) 1(61.758,16.809) 1(61.758,16.827) 1(61.758,18.711) 1(61.758,18.729) 1(61.758,19.049) 1(61.758,19.067) 1(61.776,16.435) 1(61.776,16.453) 1(61.776,16.755) 1(61.776,16.773) 1(61.776,16.791) 1(61.776,18.747) 1(61.776,18.765) 1(61.776,18.782) 1(61.776,19.085) 1(61.776,19.102) 1(61.776,19.12) 1(61.794,16.382) 1(61.794,16.4) 1(61.794,16.418) 1(61.794,16.72) 1(61.794,16.738) 1(61.794,17.147) 1(61.794,18.8) 1(61.794,18.818) 1(61.794,19.138) 1(61.794,19.156) 1(61.812,16.347) 1(61.812,16.364) 1(61.812,16.667) 1(61.812,16.684) 1(61.812,16.702) 1(61.812,17.893) 1(61.812,18.836) 1(61.812,18.854) 1(61.812,18.871) 1(61.812,19.174) 1(61.812,19.191) 1(61.83,16.311) 1(61.83,16.329) 1(61.83,16.631) 1(61.83,16.649) 1(61.83,18.889) 1(61.83,18.907) 1(61.83,19.209) 1(61.83,19.227) 1(61.83,19.245) 1(61.847,16.275) 1(61.847,16.293) 1(61.847,16.595) 1(61.847,16.613) 1(61.847,18.925) 1(61.847,18.942) 1(61.847,18.96) 1(61.847,19.262) 1(61.847,19.28) 1(61.865,16.222) 1(61.865,16.24) 1(61.865,16.258) 1(61.865,16.542) 1(61.865,16.56) 1(61.865,16.578) 1(61.865,18.978) 1(61.865,18.996) 1(61.865,19.014) 1(61.865,19.298) 1(61.865,19.316) 1(61.865,19.334) 1(61.883,16.187) 1(61.883,16.204) 1(61.883,16.507) 1(61.883,16.524) 1(61.883,19.031) 1(61.883,19.049) 1(61.883,19.351) 1(61.883,19.369) 1(61.901,16.151) 1(61.901,16.169) 1(61.901,16.453) 1(61.901,16.471) 1(61.901,16.489) 1(61.901,19.067) 1(61.901,19.085) 1(61.901,19.102) 1(61.901,19.387) 1(61.901,19.405) 1(61.918,16.133) 1(61.918,16.418) 1(61.918,16.435) 1(61.918,17.876) 1(61.918,19.12) 1(61.918,19.138) 1(61.918,19.422) 1(61.936,16.098) 1(61.936,16.115) 1(61.936,16.364) 1(61.936,16.382) 1(61.936,16.4) 1(61.936,19.156) 1(61.936,19.174) 1(61.936,19.191) 1(61.936,19.44) 1(61.936,19.458) 1(61.954,16.08) 1(61.954,16.329) 1(61.954,16.347) 1(61.954,19.209) 1(61.954,19.227) 1(61.954,19.476) 1(61.972,16.062) 1(61.972,16.275) 1(61.972,16.293) 1(61.972,16.311) 1(61.972,19.245) 1(61.972,19.262) 1(61.972,19.28) 1(61.972,19.494) 1(61.99,16.026) 1(61.99,16.044) 1(61.99,16.24) 1(61.99,16.258) 1(61.99,19.298) 1(61.99,19.316) 1(61.99,19.511) 1(61.99,19.529) 1(62.007,16.009) 1(62.007,16.204) 1(62.007,16.222) 1(62.007,19.334) 1(62.007,19.351) 1(62.007,19.547) 1(62.025,15.991) 1(62.025,16.187) 1(62.025,19.369) 1(62.025,19.565) 1(62.043,15.955) 1(62.043,15.973) 1(62.043,16.151) 1(62.043,16.169) 1(62.043,19.387) 1(62.043,19.582) 1(62.043,19.6) 1(62.061,15.938) 1(62.061,16.133) 1(62.061,17.858) 1(62.061,19.405) 1(62.061,19.618) 1(62.078,15.92) 1(62.078,16.115) 1(62.078,17.129) 1(62.078,19.422) 1(62.078,19.44) 1(62.078,19.636) 1(62.096,15.884) 1(62.096,15.902) 1(62.096,16.08) 1(62.096,16.098) 1(62.096,19.458) 1(62.096,19.654) 1(62.096,19.671) 1(62.114,15.866) 1(62.114,16.062) 1(62.114,19.476) 1(62.114,19.494) 1(62.114,19.689) 1(62.132,15.849) 1(62.132,16.044) 1(62.132,19.511) 1(62.132,19.707) 1(62.15,15.831) 1(62.15,16.009) 1(62.15,16.026) 1(62.15,19.529) 1(62.15,19.725) 1(62.167,15.795) 1(62.167,15.813) 1(62.167,15.991) 1(62.167,19.547) 1(62.167,19.565) 1(62.167,19.743) 1(62.167,19.76) 1(62.185,15.778) 1(62.185,15.973) 1(62.185,17.84) 1(62.185,19.582) 1(62.185,19.778) 1(62.203,15.76) 1(62.203,15.938) 1(62.203,15.955) 1(62.203,19.6) 1(62.203,19.796) 1(62.221,15.724) 1(62.221,15.742) 1(62.221,15.92) 1(62.221,19.618) 1(62.221,19.636) 1(62.221,19.814) 1(62.221,19.831) 1(62.239,15.706) 1(62.239,15.902) 1(62.239,19.654) 1(62.239,19.849) 1(62.256,15.689) 1(62.256,15.866) 1(62.256,15.884) 1(62.256,19.671) 1(62.256,19.867) 1(62.274,15.653) 1(62.274,15.671) 1(62.274,15.849) 1(62.274,19.689) 1(62.274,19.707) 1(62.274,19.885) 1(62.274,19.903) 1(62.292,15.635) 1(62.292,15.831) 1(62.292,19.725) 1(62.292,19.92) 1(62.31,15.618) 1(62.31,15.795) 1(62.31,15.813) 1(62.31,17.822) 1(62.31,19.743) 1(62.31,19.938) 1(62.327,15.582) 1(62.327,15.6) 1(62.327,15.778) 1(62.327,19.76) 1(62.327,19.778) 1(62.327,19.956) 1(62.327,19.974) 1(62.345,15.564) 1(62.345,15.76) 1(62.345,17.111) 1(62.345,19.796) 1(62.345,19.991) 1(62.363,15.546) 1(62.363,15.724) 1(62.363,15.742) 1(62.363,19.814) 1(62.363,20.009) 1(62.381,15.511) 1(62.381,15.529) 1(62.381,15.706) 1(62.381,17.822) 1(62.381,19.831) 1(62.381,19.849) 1(62.381,20.027) 1(62.381,20.045) 1(62.399,15.493) 1(62.399,15.689) 1(62.399,19.867) 1(62.399,20.063) 1(62.416,15.475) 1(62.416,15.671) 1(62.416,19.885) 1(62.416,20.08) 1(62.434,15.458) 1(62.434,15.635) 1(62.434,15.653) 1(62.434,19.903) 1(62.434,19.92) 1(62.434,20.098) 1(62.452,15.44) 1(62.452,15.618) 1(62.452,19.938) 1(62.452,20.116) 1(62.47,15.6) 1(62.47,19.956) 1(62.487,15.422) 1(62.487,15.564) 1(62.487,15.582) 1(62.487,19.974) 1(62.487,19.991) 1(62.487,20.134) 1(62.505,15.404) 1(62.505,15.546) 1(62.505,20.009) 1(62.505,20.151) 1(62.523,15.386) 1(62.523,17.84) 1(62.523,20.169) 1(62.541,15.529) 1(62.541,20.027) 1(62.559,15.369) 1(62.559,15.511) 1(62.559,17.111) 1(62.559,20.045) 1(62.559,20.187) 1(62.576,15.351) 1(62.576,20.205) 1(62.594,15.333) 1(62.594,15.493) 1(62.594,20.063) 1(62.594,20.223) 1(62.612,15.475) 1(62.612,20.08) 1(62.63,15.315) 1(62.63,15.458) 1(62.63,20.098) 1(62.63,20.24) 1(62.647,15.298) 1(62.647,15.44) 1(62.647,17.858) 1(62.647,20.258) 1(62.665,15.28) 1(62.665,15.422) 1(62.665,20.116) 1(62.665,20.276) 1(62.683,17.129) 1(62.683,20.134) 1(62.701,15.262) 1(62.701,15.404) 1(62.701,20.151) 1(62.701,20.294) 1(62.719,15.244) 1(62.719,15.386) 1(62.719,20.169) 1(62.719,20.311) 1(62.736,15.226) 1(62.736,15.369) 1(62.736,20.187) 1(62.736,20.329) 1(62.754,15.209) 1(62.754,17.876) 1(62.754,20.347) 1(62.772,15.351) 1(62.772,20.205) 1(62.79,15.191) 1(62.79,15.333) 1(62.79,20.223) 1(62.79,20.365) 1(62.807,15.173) 1(62.807,15.315) 1(62.807,20.24) 1(62.807,20.383) 1(62.825,15.155) 1(62.825,17.147) 1(62.825,20.4) 1(62.843,15.298) 1(62.843,20.258) 1(62.861,15.137) 1(62.861,15.28) 1(62.861,17.893) 1(62.861,20.276) 1(62.861,20.418) 1(62.879,15.12) 1(62.879,15.262) 1(62.879,20.436) 1(62.896,15.102) 1(62.896,20.294) 1(62.896,20.454) 1(62.914,15.084) 1(62.914,15.244) 1(62.914,20.311) 1(62.932,15.226) 1(62.932,17.164) 1(62.932,20.329) 1(62.932,20.471) 1(62.95,15.066) 1(62.95,15.209) 1(62.95,20.489) 1(62.967,15.049) 1(62.967,17.911) 1(62.967,20.347) 1(62.967,20.507) 1(62.985,15.031) 1(62.985,15.191) 1(62.985,20.365) 1(62.985,20.525) 1(63.003,15.173) 1(63.003,20.383) 1(63.021,15.013) 1(63.021,15.155) 1(63.021,17.182) 1(63.021,20.543) 1(63.039,14.995) 1(63.039,20.4) 1(63.039,20.56) 1(63.056,14.977) 1(63.056,15.137) 1(63.056,20.418) 1(63.056,20.578) 1(63.074,15.12) 1(63.074,20.436) 1(63.092,14.96) 1(63.092,15.102) 1(63.092,17.929) 1(63.092,20.454) 1(63.092,20.596) 1(63.11,14.942) 1(63.128,15.084) 1(63.128,17.2) 1(63.128,20.471) 1(63.128,20.614) 1(63.145,14.924) 1(63.145,15.066) 1(63.145,20.489) 1(63.163,20.632) 1(63.181,14.906) 1(63.181,15.049) 1(63.181,17.947) 1(63.181,20.507) 1(63.216,14.889) 1(63.216,15.031) 1(63.216,17.965) 1(63.216,20.525) 1(63.216,20.649) 1(63.252,17.218) 1(63.252,17.982) 1(63.252,20.667) 1(63.27,14.871) 1(63.27,15.013) 1(63.27,20.543) 1(63.288,20.685) 1(63.305,14.995) 1(63.305,18) 1(63.305,20.56) 1(63.323,14.853) 1(63.341,14.977) 1(63.341,17.236) 1(63.341,18.018) 1(63.341,20.703) 1(63.359,14.835) 1(63.359,20.578) 1(63.376,17.253) 1(63.376,18.036) 1(63.376,20.72) 1(63.394,14.924) 1(63.394,14.977) 1(63.394,20.596) 1(63.412,14.817) 1(63.412,14.924) 1(63.412,14.995) 1(63.412,17.271) 1(63.43,15.013) 1(63.43,18.053) 1(63.43,20.738) 1(63.448,14.8) 1(63.448,20.614) 1(63.465,15.031) 1(63.465,17.289) 1(63.465,18.071) 1(63.465,20.756) 1(63.483,14.889) 1(63.483,15.049) 1(63.483,20.632) 1(63.501,14.782) 1(63.501,14.889) 1(63.501,15.066) 1(63.501,17.307) 1(63.501,18.089) 1(63.519,15.084) 1(63.519,20.774) 1(63.536,14.764) 1(63.536,15.102) 1(63.536,18.107) 1(63.536,20.649) 1(63.554,15.12) 1(63.554,17.324) 1(63.554,20.792) 1(63.572,14.746) 1(63.572,15.137) 1(63.59,15.155) 1(63.59,17.342) 1(63.59,18.125) 1(63.59,20.667) 1(63.608,14.729) 1(63.608,15.173) 1(63.608,20.809) 1(63.625,15.191) 1(63.625,18.142) 1(63.625,20.685) 1(63.643,15.209) 1(63.643,17.36) 1(63.643,20.827) 1(63.661,14.711) 1(63.661,15.226) 1(63.661,18.16) 1(63.679,15.244) 1(63.679,17.378) 1(63.679,20.703) 1(63.679,20.845) 1(63.696,14.693) 1(63.696,18.178) 1(63.714,15.262) 1(63.714,20.72) 1(63.732,14.675) 1(63.732,15.28) 1(63.732,17.396) 1(63.732,20.863) 1(63.75,15.298) 1(63.75,18.196) 1(63.768,15.315) 1(63.768,17.413) 1(63.768,20.738) 1(63.768,20.88) 1(63.785,14.657) 1(63.785,15.333) 1(63.785,18.213) 1(63.803,15.351) 1(63.803,20.756) 1(63.803,20.898) 1(63.821,14.64) 1(63.821,15.369) 1(63.821,17.431) 1(63.821,18.231) 1(63.839,15.386) 1(63.856,14.622) 1(63.856,15.404) 1(63.856,17.449) 1(63.856,18.249) 1(63.856,20.774) 1(63.856,20.916) 1(63.874,15.422) 1(63.874,18.267) 1(63.892,15.44) 1(63.892,17.467) 1(63.892,20.792) 1(63.91,15.458) 1(63.91,18.285) 1(63.91,20.934) 1(63.928,15.475) 1(63.928,18.302) 1(63.945,15.493) 1(63.945,17.484) 1(63.945,18.32) 1(63.963,14.604) 1(63.963,15.511) 1(63.963,18.338) 1(63.981,17.502) 1(63.981,18.356) 1(63.981,20.809) 1(63.999,15.529) 1(64.017,15.546) 1(64.017,17.52) 1(64.017,18.373) 1(64.017,20.952) 1(64.034,15.564) 1(64.034,18.391) 1(64.052,15.582) 1(64.052,18.409) 1(64.07,15.6) 1(64.07,17.538) 1(64.07,18.427) 1(64.088,15.618) 1(64.088,15.635) 1(64.088,18.445) 1(64.088,20.827) 1(64.105,14.586) 1(64.105,15.635) 1(64.105,15.653) 1(64.105,17.556) 1(64.123,15.635) 1(64.123,15.653) 1(64.123,15.671) 1(64.123,18.462) 1(64.141,15.653) 1(64.141,15.671) 1(64.141,15.689) 1(64.141,17.573) 1(64.141,18.48) 1(64.159,15.671) 1(64.159,15.689) 1(64.159,15.706) 1(64.159,15.724) 1(64.159,17.591) 1(64.159,18.498) 1(64.177,15.689) 1(64.177,15.706) 1(64.177,15.724) 1(64.177,15.742) 1(64.177,17.609) 1(64.177,18.516) 1(64.177,20.969) 1(64.194,15.706) 1(64.194,15.724) 1(64.194,15.742) 1(64.194,15.76) 1(64.194,17.627) 1(64.194,18.533) 1(64.212,14.711) 1(64.212,15.742) 1(64.212,15.76) 1(64.212,15.778) 1(64.212,20.845) 1(64.23,14.729) 1(64.23,15.76) 1(64.23,15.795) 1(64.23,15.813) 1(64.23,17.644) 1(64.23,18.551) 1(64.248,14.569) 1(64.248,14.746) 1(64.248,15.813) 1(64.248,15.831) 1(64.248,17.662) 1(64.248,18.569) 1(64.265,14.693) 1(64.265,14.764) 1(64.265,14.782) 1(64.265,15.813) 1(64.265,15.849) 1(64.265,18.587) 1(64.283,14.8) 1(64.283,15.866) 1(64.283,17.68) 1(64.283,18.605) 1(64.301,14.817) 1(64.301,15.884) 1(64.301,15.902) 1(64.301,17.698) 1(64.301,18.622) 1(64.319,14.835) 1(64.319,15.92) 1(64.319,18.64) 1(64.319,20.863) 1(64.337,14.853) 1(64.337,15.938) 1(64.337,17.716) 1(64.337,20.987) 1(64.354,14.871) 1(64.354,15.955) 1(64.354,15.973) 1(64.354,17.733) 1(64.354,18.658) 1(64.372,14.889) 1(64.372,15.991) 1(64.372,18.676) 1(64.39,14.551) 1(64.39,14.906) 1(64.39,16.009) 1(64.39,16.026) 1(64.39,17.751) 1(64.39,18.693) 1(64.408,14.675) 1(64.408,14.924) 1(64.408,16.044) 1(64.408,17.769) 1(64.408,18.711) 1(64.425,14.942) 1(64.425,16.062) 1(64.425,16.08) 1(64.425,17.787) 1(64.443,14.96) 1(64.443,16.098) 1(64.443,17.804) 1(64.443,18.729) 1(64.443,20.88) 1(64.461,14.977) 1(64.461,16.115) 1(64.461,16.133) 1(64.461,18.747) 1(64.479,14.995) 1(64.479,16.151) 1(64.479,17.822) 1(64.479,18.765) 1(64.479,18.782) 1(64.497,15.013) 1(64.497,15.031) 1(64.497,16.169) 1(64.497,16.187) 1(64.497,17.84) 1(64.497,18.8) 1(64.497,21.005) 1(64.514,15.049) 1(64.514,16.204) 1(64.514,17.858) 1(64.514,18.818) 1(64.532,14.533) 1(64.532,14.657) 1(64.532,15.066) 1(64.532,16.222) 1(64.532,16.24) 1(64.532,18.836) 1(64.532,18.854) 1(64.55,15.084) 1(64.55,16.258) 1(64.55,17.876) 1(64.55,18.871) 1(64.568,15.102) 1(64.568,16.275) 1(64.568,16.293) 1(64.568,17.893) 1(64.568,18.889) 1(64.568,18.907) 1(64.585,15.12) 1(64.585,16.311) 1(64.585,17.911) 1(64.585,18.925) 1(64.603,15.137) 1(64.603,16.329) 1(64.603,16.347) 1(64.603,17.929) 1(64.603,18.942) 1(64.603,18.96) 1(64.603,20.898) 1(64.621,15.155) 1(64.621,16.364) 1(64.621,18.978) 1(64.639,15.173) 1(64.639,16.382) 1(64.639,16.4) 1(64.639,17.947) 1(64.639,18.996) 1(64.657,15.191) 1(64.657,16.418) 1(64.657,17.965) 1(64.657,19.014) 1(64.657,19.031) 1(64.657,21.023) 1(64.674,14.515) 1(64.674,14.64) 1(64.674,15.209) 1(64.674,16.435) 1(64.674,16.453) 1(64.674,19.049) 1(64.692,15.226) 1(64.692,16.471) 1(64.692,16.489) 1(64.692,17.982) 1(64.692,19.067) 1(64.692,19.085) 1(64.692,20.436) 1(64.692,20.454) 1(64.71,15.244) 1(64.71,16.507) 1(64.71,18) 1(64.71,19.102) 1(64.71,20.418) 1(64.71,20.471) 1(64.71,20.489) 1(64.71,20.507) 1(64.71,20.916) 1(64.728,15.262) 1(64.728,15.28) 1(64.728,16.524) 1(64.728,16.542) 1(64.728,18.018) 1(64.728,19.12) 1(64.728,19.138) 1(64.728,20.525) 1(64.728,20.543) 1(64.745,15.298) 1(64.745,16.56) 1(64.745,16.578) 1(64.745,19.156) 1(64.745,20.4) 1(64.745,20.56) 1(64.745,20.578) 1(64.763,15.315) 1(64.763,16.595) 1(64.763,16.613) 1(64.763,18.036) 1(64.763,19.174) 1(64.763,20.596) 1(64.763,20.916) 1(64.781,15.333) 1(64.781,16.631) 1(64.781,16.649) 1(64.781,18.053) 1(64.781,19.191) 1(64.781,19.209) 1(64.781,20.383) 1(64.781,20.614) 1(64.781,20.632) 1(64.799,14.515) 1(64.799,14.64) 1(64.799,15.351) 1(64.799,16.667) 1(64.799,16.684) 1(64.799,19.227) 1(64.799,20.649) 1(64.799,20.667) 1(64.817,15.369) 1(64.817,16.702) 1(64.817,16.72) 1(64.817,18.071) 1(64.817,19.245) 1(64.817,19.262) 1(64.817,20.365) 1(64.817,20.685) 1(64.817,20.703) 1(64.817,20.72) 1(64.817,21.023) 1(64.834,15.386) 1(64.834,16.738) 1(64.834,16.755) 1(64.834,18.089) 1(64.834,19.28) 1(64.834,20.347) 1(64.834,20.738) 1(64.834,20.756) 1(64.852,15.404) 1(64.852,16.773) 1(64.852,16.791) 1(64.852,16.809) 1(64.852,18.107) 1(64.852,19.298) 1(64.852,19.316) 1(64.852,20.774) 1(64.852,20.792) 1(64.852,20.898) 1(64.87,15.422) 1(64.87,16.827) 1(64.87,16.844) 1(64.87,16.862) 1(64.87,18.125) 1(64.87,18.142) 1(64.87,19.334) 1(64.87,20.329) 1(64.87,20.809) 1(64.87,20.827) 1(64.888,15.44) 1(64.888,16.88) 1(64.888,16.898) 1(64.888,18.16) 1(64.888,19.351) 1(64.888,20.845) 1(64.888,20.863) 1(64.906,15.458) 1(64.906,15.475) 1(64.906,16.915) 1(64.906,16.933) 1(64.906,18.178) 1(64.906,19.369) 1(64.906,19.387) 1(64.906,20.311) 1(64.906,20.88) 1(64.923,15.493) 1(64.923,16.951) 1(64.923,16.969) 1(64.923,18.196) 1(64.923,18.213) 1(64.923,19.405) 1(64.923,19.422) 1(64.941,14.533) 1(64.941,14.657) 1(64.941,15.511) 1(64.941,15.529) 1(64.941,16.987) 1(64.941,17.004) 1(64.941,17.022) 1(64.941,18.231) 1(64.941,19.44) 1(64.941,19.458) 1(64.941,19.476) 1(64.941,20.294) 1(64.959,15.546) 1(64.959,17.04) 1(64.959,17.058) 1(64.959,17.076) 1(64.959,18.249) 1(64.959,19.494) 1(64.959,19.511) 1(64.959,19.529) 1(64.959,20.276) 1(64.977,15.564) 1(64.977,15.582) 1(64.977,17.093) 1(64.977,17.111) 1(64.977,18.267) 1(64.977,19.547) 1(64.977,19.565) 1(64.977,19.582) 1(64.977,21.005) 1(64.994,15.6) 1(64.994,17.129) 1(64.994,17.147) 1(64.994,18.285) 1(64.994,19.6) 1(64.994,19.618) 1(64.994,20.258) 1(65.012,15.618) 1(65.012,15.635) 1(65.012,17.164) 1(65.012,17.182) 1(65.012,17.2) 1(65.012,18.302) 1(65.012,19.636) 1(65.012,19.654) 1(65.012,19.671) 1(65.03,15.653) 1(65.03,15.671) 1(65.03,17.218) 1(65.03,17.236) 1(65.03,17.253) 1(65.03,18.32) 1(65.03,19.689) 1(65.03,19.707) 1(65.03,19.725) 1(65.03,20.24) 1(65.048,14.675) 1(65.048,15.689) 1(65.048,17.271) 1(65.048,17.289) 1(65.048,17.307) 1(65.048,18.338) 1(65.048,18.356) 1(65.048,19.743) 1(65.048,19.76) 1(65.048,19.778) 1(65.066,15.706) 1(65.066,15.724) 1(65.066,17.324) 1(65.066,17.342) 1(65.066,18.373) 1(65.066,19.796) 1(65.066,19.814) 1(65.066,19.831) 1(65.066,20.223) 1(65.083,14.551) 1(65.083,15.742) 1(65.083,15.76) 1(65.083,17.36) 1(65.083,17.378) 1(65.083,17.396) 1(65.083,18.391) 1(65.083,19.849) 1(65.083,19.867) 1(65.083,20.205) 1(65.101,15.778) 1(65.101,17.413) 1(65.101,17.431) 1(65.101,18.409) 1(65.101,19.885) 1(65.101,19.903) 1(65.101,19.92) 1(65.119,15.795) 1(65.119,15.813) 1(65.119,17.449) 1(65.119,17.467) 1(65.119,17.484) 1(65.119,18.427) 1(65.119,18.445) 1(65.119,19.938) 1(65.119,19.956) 1(65.119,19.974) 1(65.119,20.187) 1(65.137,15.831) 1(65.137,17.502) 1(65.137,17.52) 1(65.137,17.538) 1(65.137,18.462) 1(65.137,19.991) 1(65.137,20.009) 1(65.137,20.027) 1(65.137,20.88) 1(65.137,20.987) 1(65.154,15.849) 1(65.154,17.556) 1(65.154,17.573) 1(65.154,17.591) 1(65.154,18.48) 1(65.154,20.045) 1(65.154,20.063) 1(65.154,20.08) 1(65.154,20.169) 1(65.172,15.866) 1(65.172,15.884) 1(65.172,17.609) 1(65.172,17.627) 1(65.172,17.644) 1(65.172,18.498) 1(65.172,20.098) 1(65.172,20.116) 1(65.19,14.693) 1(65.19,15.902) 1(65.19,17.662) 1(65.19,17.68) 1(65.19,17.698) 1(65.19,18.516) 1(65.19,20.134) 1(65.19,20.151) 1(65.208,15.92) 1(65.208,15.938) 1(65.208,17.716) 1(65.208,17.733) 1(65.208,17.751) 1(65.208,17.769) 1(65.208,18.533) 1(65.208,18.551) 1(65.226,14.569) 1(65.226,15.955) 1(65.226,17.787) 1(65.226,17.804) 1(65.226,17.822) 1(65.226,17.84) 1(65.226,17.858) 1(65.226,17.876) 1(65.226,17.893) 1(65.226,17.911) 1(65.226,18.569) 1(65.226,20.88) 1(65.243,15.973) 1(65.243,15.991) 1(65.243,17.929) 1(65.243,17.947) 1(65.243,17.965) 1(65.243,17.982) 1(65.243,18) 1(65.243,18.587) 1(65.243,20.863) 1(65.261,16.009) 1(65.261,18.018) 1(65.261,18.036) 1(65.261,18.053) 1(65.261,18.071) 1(65.261,18.089) 1(65.261,18.107) 1(65.261,18.125) 1(65.261,18.142) 1(65.261,18.16) 1(65.261,18.605) 1(65.279,16.026) 1(65.279,16.044) 1(65.279,18.178) 1(65.279,18.196) 1(65.279,18.213) 1(65.279,18.231) 1(65.279,18.249) 1(65.279,18.267) 1(65.279,18.622) 1(65.279,20.969) 1(65.297,16.062) 1(65.297,18.285) 1(65.297,18.302) 1(65.297,18.32) 1(65.297,18.338) 1(65.297,18.356) 1(65.297,18.373) 1(65.297,18.64) 1(65.297,20.863) 1(65.314,14.711) 1(65.314,16.08) 1(65.314,16.098) 1(65.314,16.133) 1(65.314,18.391) 1(65.314,18.409) 1(65.314,18.427) 1(65.314,18.445) 1(65.314,18.462) 1(65.314,18.48) 1(65.314,18.498) 1(65.314,18.516) 1(65.314,18.658) 1(65.332,16.115) 1(65.332,16.133) 1(65.332,18.533) 1(65.332,18.551) 1(65.332,18.569) 1(65.332,18.587) 1(65.332,18.676) 1(65.332,18.693) 1(65.35,16.133) 1(65.35,16.151) 1(65.35,16.187) 1(65.35,18.605) 1(65.35,18.622) 1(65.35,18.64) 1(65.35,18.658) 1(65.35,18.676) 1(65.35,18.711) 1(65.368,14.586) 1(65.368,16.169) 1(65.368,16.187) 1(65.368,18.693) 1(65.368,18.711) 1(65.386,16.187) 1(65.386,16.204) 1(65.403,16.222) 1(65.421,14.729) 1(65.421,16.24) 1(65.421,16.258) 1(65.439,16.275) 1(65.439,16.293) 1(65.439,20.952) 1(65.457,16.311) 1(65.457,16.329) 1(65.474,16.347) 1(65.474,16.364) 1(65.474,16.382) 1(65.492,16.4) 1(65.492,16.418) 1(65.51,14.604) 1(65.51,16.435) 1(65.51,16.453) 1(65.51,16.471) 1(65.51,20.792) 1(65.528,16.489) 1(65.528,16.507) 1(65.528,20.774) 1(65.546,16.524) 1(65.546,16.542) 1(65.546,16.56) 1(65.546,20.756) 1(65.546,20.934) 1(65.563,14.746) 1(65.563,16.578) 1(65.563,16.595) 1(65.563,20.792) 1(65.581,16.613) 1(65.581,16.631) 1(65.581,16.649) 1(65.581,20.738) 1(65.599,14.622) 1(65.599,14.764) 1(65.599,16.667) 1(65.599,16.684) 1(65.599,20.72) 1(65.599,20.774) 1(65.599,20.916) 1(65.617,16.702) 1(65.617,16.72) 1(65.617,16.738) 1(65.617,20.703) 1(65.634,14.64) 1(65.634,14.782) 1(65.634,16.755) 1(65.634,16.773) 1(65.652,16.791) 1(65.652,16.809) 1(65.652,16.827) 1(65.652,20.685) 1(65.652,20.756) 1(65.652,20.898) 1(65.67,14.657) 1(65.67,16.844) 1(65.67,16.862) 1(65.67,20.667) 1(65.688,14.8) 1(65.688,16.88) 1(65.688,16.898) 1(65.688,20.649) 1(65.688,20.738) 1(65.688,20.88) 1(65.706,16.915) 1(65.706,16.933) 1(65.706,16.951) 1(65.723,14.675) 1(65.723,14.817) 1(65.723,16.969) 1(65.723,16.987) 1(65.723,17.004) 1(65.723,20.632) 1(65.723,20.863) 1(65.741,17.022) 1(65.741,17.04) 1(65.741,20.614) 1(65.741,20.72) 1(65.759,14.693) 1(65.759,17.058) 1(65.759,17.076) 1(65.759,20.596) 1(65.777,14.835) 1(65.777,17.093) 1(65.777,17.111) 1(65.777,17.129) 1(65.777,20.703) 1(65.777,20.845) 1(65.795,14.711) 1(65.795,17.147) 1(65.795,17.164) 1(65.795,17.182) 1(65.795,20.578) 1(65.812,14.853) 1(65.812,17.2) 1(65.812,17.218) 1(65.812,20.56) 1(65.812,20.827) 1(65.83,17.236) 1(65.83,17.253) 1(65.83,20.543) 1(65.83,20.685) 1(65.848,14.729) 1(65.848,14.871) 1(65.848,17.271) 1(65.848,17.289) 1(65.848,17.307) 1(65.848,17.324) 1(65.848,20.809) 1(65.866,17.342) 1(65.866,17.36) 1(65.866,17.378) 1(65.866,17.396) 1(65.866,17.413) 1(65.866,20.525) 1(65.866,20.667) 1(65.883,14.746) 1(65.883,17.431) 1(65.883,17.449) 1(65.883,17.467) 1(65.883,17.484) 1(65.883,17.502) 1(65.883,17.52) 1(65.883,20.507) 1(65.901,14.889) 1(65.901,17.538) 1(65.901,17.556) 1(65.901,17.573) 1(65.901,17.591) 1(65.901,17.609) 1(65.901,20.489) 1(65.901,20.792) 1(65.919,14.764) 1(65.919,17.627) 1(65.919,17.644) 1(65.919,17.662) 1(65.919,17.68) 1(65.919,20.471) 1(65.919,20.649) 1(65.937,14.906) 1(65.937,17.698) 1(65.937,17.716) 1(65.937,17.733) 1(65.937,17.751) 1(65.937,17.769) 1(65.937,20.454) 1(65.937,20.774) 1(65.955,14.782) 1(65.955,17.787) 1(65.955,17.804) 1(65.955,17.822) 1(65.955,17.84) 1(65.955,17.858) 1(65.972,17.876) 1(65.972,17.893) 1(65.972,17.911) 1(65.972,17.929) 1(65.972,20.436) 1(65.972,20.632) 1(65.99,14.924) 1(65.99,17.947) 1(65.99,17.965) 1(65.99,17.982) 1(65.99,18) 1(65.99,18.018) 1(65.99,20.418) 1(65.99,20.756) 1(66.008,14.8) 1(66.008,18.036) 1(66.008,18.053) 1(66.008,18.071) 1(66.008,18.089) 1(66.008,20.4) 1(66.008,20.614) 1(66.026,14.942) 1(66.026,18.107) 1(66.026,18.125) 1(66.026,18.142) 1(66.026,18.16) 1(66.026,18.178) 1(66.026,20.738) 1(66.043,14.817) 1(66.043,18.196) 1(66.043,18.213) 1(66.043,18.231) 1(66.043,18.249) 1(66.043,20.383) 1(66.061,14.96) 1(66.061,18.267) 1(66.061,18.285) 1(66.061,18.302) 1(66.061,18.32) 1(66.061,18.338) 1(66.061,18.356) 1(66.061,18.373) 1(66.061,18.391) 1(66.061,18.409) 1(66.061,18.427) 1(66.061,18.445) 1(66.061,18.462) 1(66.061,18.48) 1(66.061,18.498) 1(66.061,18.516) 1(66.061,18.533) 1(66.061,18.551) 1(66.061,18.569) 1(66.061,18.587) 1(66.061,18.605) 1(66.061,18.622) 1(66.061,18.64) 1(66.061,18.658) 1(66.061,18.676) 1(66.061,18.693) 1(66.061,18.711) 1(66.061,18.729) 1(66.061,18.747) 1(66.061,18.765) 1(66.061,18.782) 1(66.061,18.8) 1(66.061,18.818) 1(66.061,20.365) 1(66.061,20.596) 1(66.079,18.836) 1(66.079,18.854) 1(66.079,18.871) 1(66.079,18.889) 1(66.079,18.907) 1(66.079,18.925) 1(66.079,18.942) 1(66.079,18.96) 1(66.079,18.978) 1(66.079,18.996) 1(66.079,19.014) 1(66.079,19.031) 1(66.079,19.049) 1(66.079,19.067) 1(66.079,19.085) 1(66.079,19.102) 1(66.079,19.12) 1(66.079,19.138) 1(66.079,19.156) 1(66.079,19.174) 1(66.079,19.191) 1(66.079,19.209) 1(66.079,19.227) 1(66.079,19.245) 1(66.079,19.262) 1(66.079,19.28) 1(66.079,19.298) 1(66.079,20.347) 1(66.079,20.72) 1(66.097,14.835) 1(66.097,19.28) 1(66.097,19.298) 1(66.097,20.578) 1(66.115,14.977) 1(66.115,19.262) 1(66.115,20.329) 1(66.115,20.703) 1(66.132,14.853) 1(66.132,19.227) 1(66.132,19.245) 1(66.132,20.311) 1(66.15,14.995) 1(66.15,19.209) 1(66.15,20.294) 1(66.15,20.56) 1(66.168,19.174) 1(66.168,19.191) 1(66.168,20.685) 1(66.186,14.871) 1(66.186,15.013) 1(66.186,19.138) 1(66.186,19.156) 1(66.186,20.276) 1(66.186,20.543) 1(66.203,19.12) 1(66.203,20.258) 1(66.203,20.667) 1(66.221,19.085) 1(66.221,19.102) 1(66.221,20.24) 1(66.239,14.889) 1(66.239,15.031) 1(66.239,19.067) 1(66.239,20.223) 1(66.239,20.525) 1(66.239,20.649) 1(66.257,19.031) 1(66.257,19.049) 1(66.257,20.187) 1(66.257,20.205) 1(66.275,14.906) 1(66.275,15.049) 1(66.275,18.996) 1(66.275,19.014) 1(66.275,20.169) 1(66.275,20.507) 1(66.292,18.978) 1(66.292,20.151) 1(66.292,20.632) 1(66.31,14.924) 1(66.31,15.066) 1(66.31,18.942) 1(66.31,18.96) 1(66.31,20.134) 1(66.31,20.489) 1(66.328,15.084) 1(66.328,18.907) 1(66.328,18.925) 1(66.328,20.116) 1(66.328,20.471) 1(66.328,20.614) 1(66.346,14.942) 1(66.346,18.889) 1(66.346,20.098) 1(66.363,14.96) 1(66.363,15.102) 1(66.363,18.854) 1(66.363,18.871) 1(66.363,20.08) 1(66.363,20.454) 1(66.363,20.596) 1(66.381,15.12) 1(66.381,18.836) 1(66.381,20.063) 1(66.381,20.436) 1(66.399,14.977) 1(66.399,15.137) 1(66.399,18.8) 1(66.399,18.818) 1(66.399,20.027) 1(66.399,20.045) 1(66.399,20.418) 1(66.399,20.578) 1(66.417,14.995) 1(66.417,18.765) 1(66.417,18.782) 1(66.417,20.009) 1(66.417,20.56) 1(66.435,15.013) 1(66.435,15.155) 1(66.435,18.747) 1(66.435,19.991) 1(66.435,20.4) 1(66.435,20.543) 1(66.452,15.173) 1(66.452,18.711) 1(66.452,18.729) 1(66.452,19.974) 1(66.452,20.383) 1(66.47,15.031) 1(66.47,15.191) 1(66.47,18.693) 1(66.47,19.938) 1(66.47,19.956) 1(66.47,20.365) 1(66.47,20.525) 1(66.488,15.049) 1(66.488,18.676) 1(66.488,19.92) 1(66.488,20.507) 1(66.506,15.066) 1(66.506,15.209) 1(66.506,18.64) 1(66.506,18.658) 1(66.506,19.903) 1(66.506,20.347) 1(66.506,20.489) 1(66.524,15.226) 1(66.524,18.622) 1(66.524,19.885) 1(66.524,20.329) 1(66.524,20.471) 1(66.541,15.084) 1(66.541,15.244) 1(66.541,18.569) 1(66.541,18.587) 1(66.541,18.605) 1(66.541,19.867) 1(66.541,20.311) 1(66.559,15.102) 1(66.559,18.551) 1(66.559,19.849) 1(66.559,20.454) 1(66.577,15.12) 1(66.577,15.262) 1(66.577,18.516) 1(66.577,18.533) 1(66.577,19.814) 1(66.577,19.831) 1(66.577,20.294) 1(66.577,20.436) 1(66.595,15.137) 1(66.595,15.28) 1(66.595,18.498) 1(66.595,19.796) 1(66.595,20.276) 1(66.595,20.418) 1(66.612,15.298) 1(66.612,18.462) 1(66.612,18.48) 1(66.612,19.778) 1(66.612,20.258) 1(66.63,15.155) 1(66.63,18.409) 1(66.63,18.427) 1(66.63,18.445) 1(66.63,19.76) 1(66.63,20.4) 1(66.648,15.173) 1(66.648,15.315) 1(66.648,18.338) 1(66.648,18.356) 1(66.648,18.373) 1(66.648,18.391) 1(66.648,19.743) 1(66.648,20.24) 1(66.648,20.383) 1(66.666,15.191) 1(66.666,15.333) 1(66.666,18.285) 1(66.666,18.302) 1(66.666,18.32) 1(66.666,19.725) 1(66.666,20.223) 1(66.666,20.365) 1(66.684,15.351) 1(66.684,18.231) 1(66.684,18.249) 1(66.684,18.267)